# Altium PCB SV601286G_PCB.PcbDoc (part 2 of 2)
Units mil, origin at the board's own origin, x right, y up, seen from the top; angles counter-clockwise.
Board outline 2750 x 2300 mil, 2 copper layers (Top Layer, Bottom Layer), stack 61 mil thick; 81 components, 27 nets, 133 pads, 50 vias.
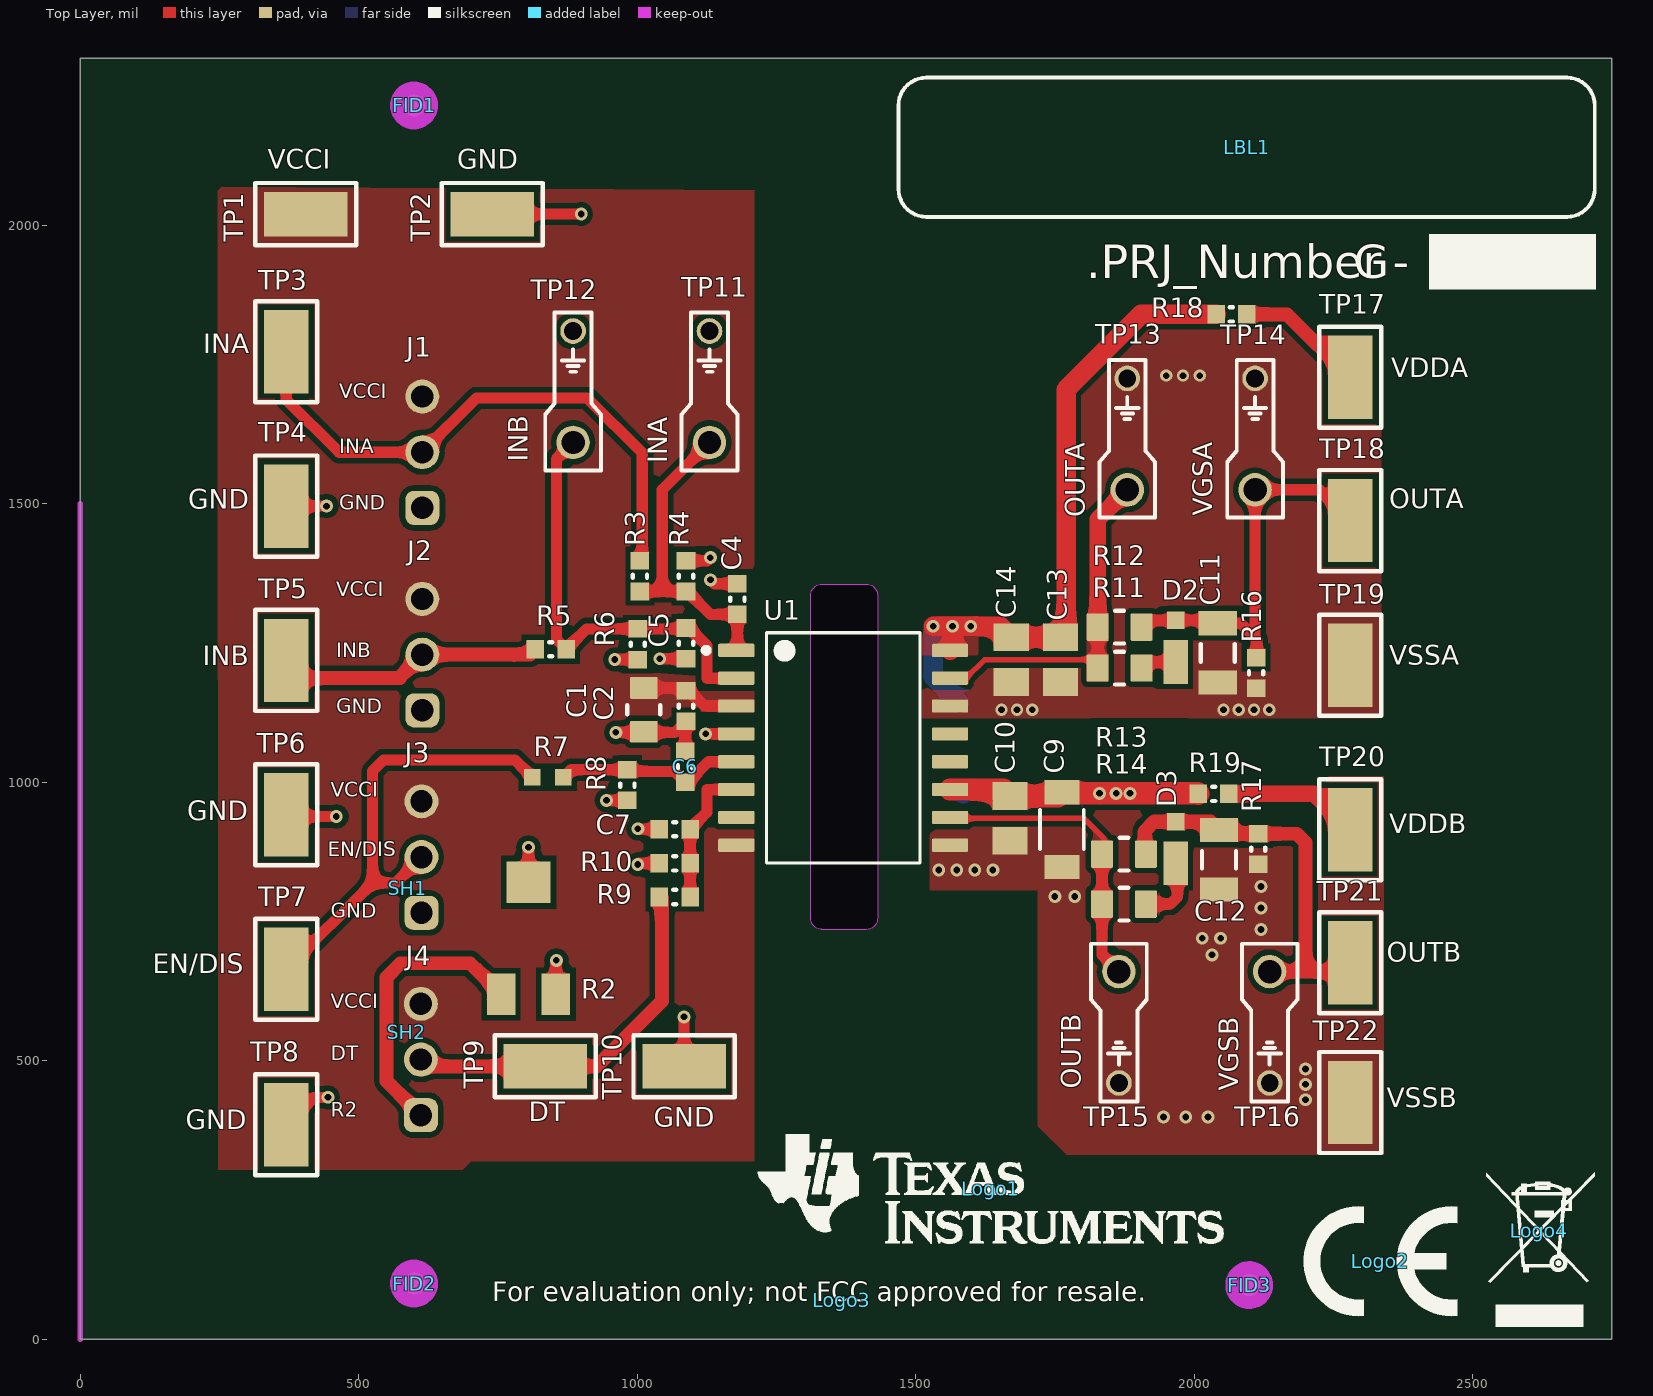
[diagram p0: Top Layer view]

## Silkscreen, mask and mechanical layers (free items; w line width, h text height) (continued)
M9 Title Sheet: (continued)
  text "DESIGNED FOR:" at 11343.5,-23.5 h45
  text ".PRJ_Customer" at 11393.5,-163.5 h70
  text "D" at -416.5,-231.5 h70
  text "D" at 14383.5,-231.5 h70
  text "FILE NAME:" at 11343.5,-323.5 h45
  text ".PCB_File_Name_No_Path" at 11393.5,-443.5 h70
  text "Texas Instruments (TI) and/or its licensors do not warrant the accuracy or completeness of this specification" at 6374,-605.34 h45
  text "ENGINEER:" at 11343.5,-613.5 h45
  text "LAYOUT BY:" at 12848.5,-613.5 h45
  text "or any information contained therein. TI and/or its licensors do not warrant that this design will meet" at 6329.01,-718 h45
  text ".PRJ_Engineer" at 11393.5,-768.49 h70
  text ".PCB_Layout" at 12899,-768.49 h70
  text "the specifications, will be suitable for your application or fit for any particular purpose, or will operate in" at 6329.01,-830.67 h45
  text ".Layer_Name" at 577,-858.49 h60
  text "ALTIUM DESIGNER VERSION:" at 12848.5,-923.5 h45
  text "an implementation. TI and/or its licensors do not warrant that the design is production worthy. You should" at 6329.01,-943.33 h45
  text "completely validate and test your design implementation to confirm the system functionality for your application." at 6374,-1056 h45
  text ".print_Scale" at 11393.5,-1056.83 h70
  text ".Application_BuildNumber" at 12899,-1056.83 h70
  text "1" at 739.84,-1263.5 h70
  text "2" at 3235.5,-1263.5 h70
  text "3" at 5724.84,-1263.5 h70
  text "4" at 8231.51,-1263.5 h70
  text "5" at 10730.5,-1263.5 h70
  text "6" at 13235.5,-1263.5 h70
M10 Fab Notes:
  drawing of 185 lines, arcs and shapes, not listed
  text "DESIGN INFORMATION" at 12381.02,5910 h60
  text "MIN. TRACK WIDTH:" at 11736.46,5730 h60
  text "6" at 12832.7,5730 h60
  text "MIL" at 12987.46,5730 h60
  text "MIN. CLEARANCE:" at 11736.46,5598 h60
  text "0.2" at 12772.7,5598 h60
  text "mm" at 12987.46,5598 h60
  text "MIN. VIA PAD SIZE:" at 11736.46,5466 h60
  text "20" at 12802.71,5466 h60
  text "MIL" at 12987.46,5466 h60
  text "0.05mm (2MIL)" at 12431.46,5324.29 h60
  text "MINIMUM ANNULAR RING" at 11407.23,5320 h60
  text "EXTERNAL" at 13139.46,5320 h60
  text "PER" at 11607.23,5202 h60
  text "IPC-D-275 CLASS 2 LEVEL C" at 11827.23,5202 h60
  text "MIL, HOLES" at 13315.46,5089.71 h60
  text "+/-" at 12923,5089 h60
  text "+/-" at 13777,5089 h60
  text "REGISTRATION TOLERANCES:" at 11407.23,5084 h60
  text "METAL" at 12607,5084 h60
  text "5" at 13183.2,5084 h60
  text "3" at 14016.2,5084 h60
  text "MIL" at 14132.46,5084 h60
  text "MATERIAL:" at 11332.46,4874.54 h60
  text "FR-4 High Tg" at 12318.9,4734.21 h60
  text "FR-408" at 11753.46,4725.64 h60
  text "X" at 12165.46,4725.64 h60
  text "OTHER" at 13241.46,4725.64 h60
  text "62 MIL (1.6mm) +/-10%" at 12073.56,4562.92 h60
  text "THICKNESS:" at 11407.23,4558.64 h60
  text "X" at 11945.4,4558.64 h60
  text "OTHER" at 13358.46,4558.64 h60
  text "TOLERANCE:" at 11407.23,4400.64 h60
  text "X" at 12246.53,4400.64 h60
  text "ANSI IPC-6012 TYPE 3 CLASS 2" at 12433.48,4400.64 h60
  text "OTHER +/-" at 12433.46,4244.64 h60
  text "BOW & TWIST:" at 11407.23,4087.64 h60
  text "X" at 12246.53,4087.64 h60
  text "ANSI IPC-6012 TYPE 3 CLASS 2" at 12433.48,4087.64 h60
  text "OTHER +/-" at 12433.46,3929.13 h60
  text "DRILLING:" at 11332.46,3790.64 h60
  text "REFERENCE:" at 11407.23,3673.64 h60
  text "X" at 12055.46,3673.64 h60
  text "AS SHOWN" at 12242.46,3673.64 h60
  text "X" at 12956.46,3673.64 h60
  text "NC_DRILL FILES" at 13093.46,3673.64 h60
  text "PTH MIN COPPER THICKNESS:" at 11407.23,3515.64 h60
  text "X" at 12757.46,3515.64 h60
  text "1MIL" at 12894.46,3515.64 h60
  text "OTHER" at 13391.46,3515.64 h60
  text "BOARD FINISH:" at 11332.46,3356.64 h60
  text "SILKSCREEN:" at 11487.68,3238.64 h60
  text "X" at 12436.46,3238.64 h60
  text "TOP" at 12562.46,3238.64 h60
  text "X" at 12946.46,3238.64 h60
  text "BOTTOM" at 13073.46,3238.64 h60
  text "SILKSCREEN COLOR:" at 11487.68,3071.64 h60
  text "X" at 12435.42,3071.64 h60
  text "WHITE" at 12562.46,3071.64 h60
  text "OTHER" at 13073.46,3071.64 h60
  text "SOLDER RESIST COLOR:" at 11487.68,2901.64 h60
  text "X" at 12055.42,2742.44 h60
  text "GREEN" at 12182.46,2742.44 h60
  text "BLUE" at 12773.46,2742.44 h60
  text "OTHER" at 13311.46,2742.44 h60
  text "IMMERSION GOLD (ENIG)" at 12393.46,2553.92 h60
  text "ENEPIG" at 13731,2550.64 h60
  text "SURFACE FINISH:" at 11332.46,2549.64 h60
  text "X" at 12206.51,2549.64 h60
  text "IMM. TIN/SILVER OR EQUIV" at 11662,2392.64 h60
  text "OTHER" at 13093.46,2392.64 h60
  text "ARRAY/PANEL:" at 11332.46,2213.64 h60
  text "CUT AND TRIM PER MECH LAYER 1" at 12393.46,2209.35 h60
  text "N.C. ROUTE" at 12393.46,2057.64 h60
  text "X" at 13072.46,2057.64 h60
  text "V. SCORE" at 13259.46,2057.64 h60
  text "CERTIFICATION:" at 11332.46,1920.64 h60
  text "MATERIALS AND WORKMANSHIP FOR ALL PCBS" at 12057.46,1920.64 h60
  text "TO MEET OR EXCEED THE REQUIREMENTS OF:" at 12057.46,1822.64 h60
  text "X" at 11683.96,1686.13 h60
  text "ANSI IPC-A-600F CLASS ->" at 11822.96,1686.13 h60
  text "X" at 13462.02,1686.13 h60
  text "2" at 13580.96,1686.14 h60
  text "1" at 13265.96,1684.64 h60
  text "3" at 13934.96,1684.64 h60
  text "Board Cutout Dimension and Angle" at 660,1610 h50
  text "X" at 11686.02,1526.64 h60
  text "UL 94V-0" at 11822.96,1526.64 h60
  text "X" at 12498.02,1526.64 h60
  text "RoHS" at 12634.96,1526.64 h60
  text "OTHER" at 13279.36,1526.64 h60
  text "PER ORDER" at 13676.42,1526.64 h60
  text "ADDITIONAL REQUIREMENTS:" at 11332.46,1385.64 h60
  text "MICROSECTION:" at 11407.23,1270.64 h60
  text "YES" at 12312.96,1270.64 h60
  text "REQUIRED" at 13174.46,1114.49 h60
  text "BARE BOARD ELEC. TEST:" at 11407.23,1111.64 h60
  text "NONE" at 12712.96,1111.64 h60
  text "X" at 13047.46,1111.64 h60
  text "PER ORDER" at 13766.46,1111.64 h60
  text "MANUFACTURER'S UL:" at 11407.23,954.64 h60
  text "RAIL" at 12572.96,950.35 h60
  text "METAL" at 13064.77,950.35 h60
  text "X" at 13440,950 h60
  text "SILK" at 13576.46,950.35 h60
  text ".Layer_Name" at 577,-858.49 h60
M11 Gerber Information:
  lines w10: -292,-930.17 6308,-930.17 ; -292,-726.83 6310,-726.83 ; -292,-523.5 -292,-1133.5 3713,-1133.5 6310,-1133.5 6310,-523.5 -291.5,-523.5 -291.5,-1133.5 1284,-1133.5 ; 2173,-1133.5 2173,-523.5 ; 3440,-726.83 3440,-523.5 ; 4280,-726.83 4280,-523.5 ; 4902,-1140 4902,-937.17
  text "ALL ARTWORK VIEWED FROM TOP SIDE" at -228.5,-655.67 h60
  text "BOARD #:" at 2248,-655.67 h60
  text ".PRJ_Number" at 2793.5,-655.67 h60
  text "REV:" at 3638,-655.67 h60
  text ".PCB_Rev" at 3929.5,-655.67 h60
  text "SVN REV:" at 4476,-655.67 h60
  text ".VersionControl_RevNumber" at 4982,-655.67 h60
  text "LAYER NAME =" at -228.5,-858.49 h60
  text "TID #:" at 2248,-859 h60
  text ".TID" at 2793.5,-859 h60
  text "PLOT NAME =" at -228.5,-1064.34 h60
  text ".plot_File_Name" at 577,-1064.34 h60
  text "GENERATED    :" at 2250,-1064.34 h60
  text ".Print_Date" at 3119.5,-1064.34 h60
  text ".Print_Time" at 3848.5,-1064.34 h60
  text "TEXAS INSTRUMENTS" at 5113,-1064.34 h60
M12 Stackup:
  drawing of 191 lines, arcs and shapes, not listed
  text "Layer" at 6155,3600 h60
  text "Name" at 6564.91,3600 h60
  text "Material" at 7494.66,3600 h60
  text "Thickness" at 8354.42,3600 h60
  text "Constant" at 9004.26,3600 h60
  text "Board Layer Stack" at 9574.12,3600 h60
  text "1" at 6155,3480 h60
  text "Top Overlay" at 6564.91,3480 h60
  text "2" at 6155,3360 h60
  text "Top Solder" at 6564.91,3360 h60
  text "Solder Resist" at 7494.66,3360 h60
  text "0.40mil" at 8354.42,3360 h60
  text "3.5" at 9004.26,3360 h60
  text "3" at 6155,3240 h60
  text "Top Layer" at 6564.91,3240 h60
  text "Copper" at 7494.66,3240 h60
  text "1.40mil" at 8354.42,3240 h60
  text "4" at 6155,3120 h60
  text "Dielectric1" at 6564.91,3120 h60
  text "FR-4" at 7494.66,3120 h60
  text "58.20mil" at 8354.42,3120 h60
  text "4.8" at 9004.26,3120 h60
  text "5" at 6155,3000 h60
  text "Bottom Layer" at 6564.91,3000 h60
  text "Copper" at 7494.66,3000 h60
  text "1.40mil" at 8354.42,3000 h60
  text "6" at 6155,2880 h60
  text "Bottom Solder" at 6564.91,2880 h60
  text "Solder Resist" at 7494.66,2880 h60
  text "0.40mil" at 8354.42,2880 h60
  text "3.5" at 9004.26,2880 h60
  text "7" at 6155,2760 h60
  text "Bottom Overlay" at 6564.91,2760 h60
  text ".Layer_Name" at 577,-858.49 h60
M13 Component Bodies Top:
  text ".Layer_Name" at 577,-858.49 h60
M14 Component Bodies Bottom:
  text ".Layer_Name" at 577,-858.49 h60
M15 Courtyards Top:
  text ".Layer_Name" at 577,-858.49 h60
M16 Courtyards Bottom:
  text ".Layer_Name" at 577,-858.49 h60
Drill Drawing:
  circle w10: c7083.72,2206.28 r27.63
  lines w10: 7056.09,1819.51 7069.9,1819.51 7083.72,1805.7 7097.53,1819.51 7111.34,1819.51 7097.53,1833.32 7111.34,1847.14 7097.53,1847.14 7083.72,1860.95 7069.9,1847.14 7056.09,1847.14 7069.9,1833.32 7056.09,1819.51 ; 7056.09,1930.02 7111.34,1930.02 7111.34,1985.27 7056.09,1985.27 7056.09,1930.02 ; 7056.09,2109.59 7111.34,2109.59 7083.72,2054.34 7056.09,2109.59
  lines w12: 7006,1768.4 8984.02,1768.4 ; 7006,2265.68 8984.02,2265.68 ; 7343.86,1644.08 7343.86,2390 ; 7675.86,1644.08 7675.86,2390 ; 8312.43,1644.08 8312.43,2390 ; 8571.57,1644.08 8571.57,2390 ; 7006,1644.08 8984.02,1644.08 8984.02,2390 7006,2390 7006,1644.08
  text "Symbol" at 7080.59,2302.98 h72
  text "Quantity" at 7381.16,2302.98 h72
  text "Finished Hole Size" at 7713.16,2302.98 h72
  text "Plated" at 8349.72,2302.98 h72
  text "Hole Type" at 8608.86,2302.98 h72
  text "50" at 7381.16,2178.66 h60
  text "12.00mil (0.305mm)" at 7713.16,2178.66 h60
  text "PTH" at 8349.72,2178.66 h60
  text "Round" at 8608.86,2178.66 h60
  text "6" at 7381.16,2054.34 h60
  text "32.00mil (0.813mm)" at 7713.16,2054.34 h60
  text "PTH" at 8349.72,2054.34 h60
  text "Round" at 8608.86,2054.34 h60
  text "12" at 7381.16,1930.02 h60
  text "40.16mil (1.020mm)" at 7713.16,1930.02 h60
  text "PTH" at 8349.72,1930.02 h60
  text "Round" at 8608.86,1930.02 h60
  text "6" at 7381.16,1805.7 h60
  text "42.00mil (1.067mm)" at 7713.16,1805.7 h60
  text "PTH" at 8349.72,1805.7 h60
  text "Round" at 8608.86,1805.7 h60
  text "74 Total" at 7381.16,1681.38 h60
  text ".Layer_Name" at 577,-858.49 h60

## Dimensions
1340,1350 to 1340,730 on M10 Fab Notes
1310,750 to 1310,770 on M10 Fab Notes
1310,1280 to 1430,1280 on M10 Fab Notes
0,-400 to 1000,-400 on M2 Board Dimensions
0,0 to 0,2300 on M2 Board Dimensions
0,0 to 2750,0 on M2 Board Dimensions

## Text inside footprints (layer, text, board x,y; h text height)
Logo3: Top Overlay "For evaluation only; not FCC approved for resale." at 739.94,56.1 h60